# EAGLE board mubi-ESP32-36 (EAGLE 7.2.0)
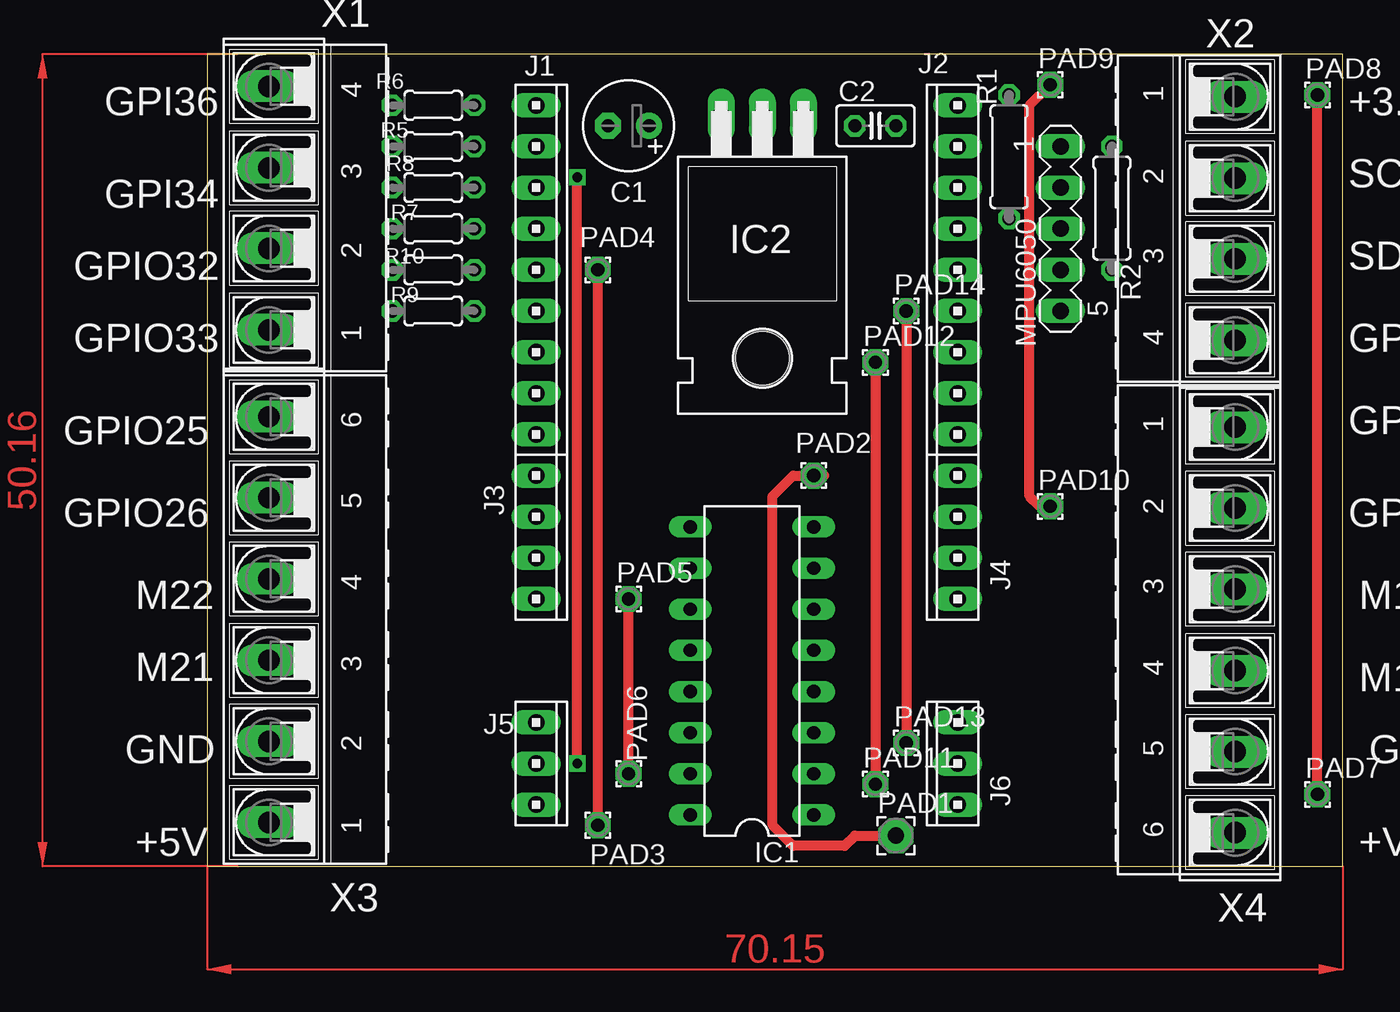
[diagram p0: board, top side]
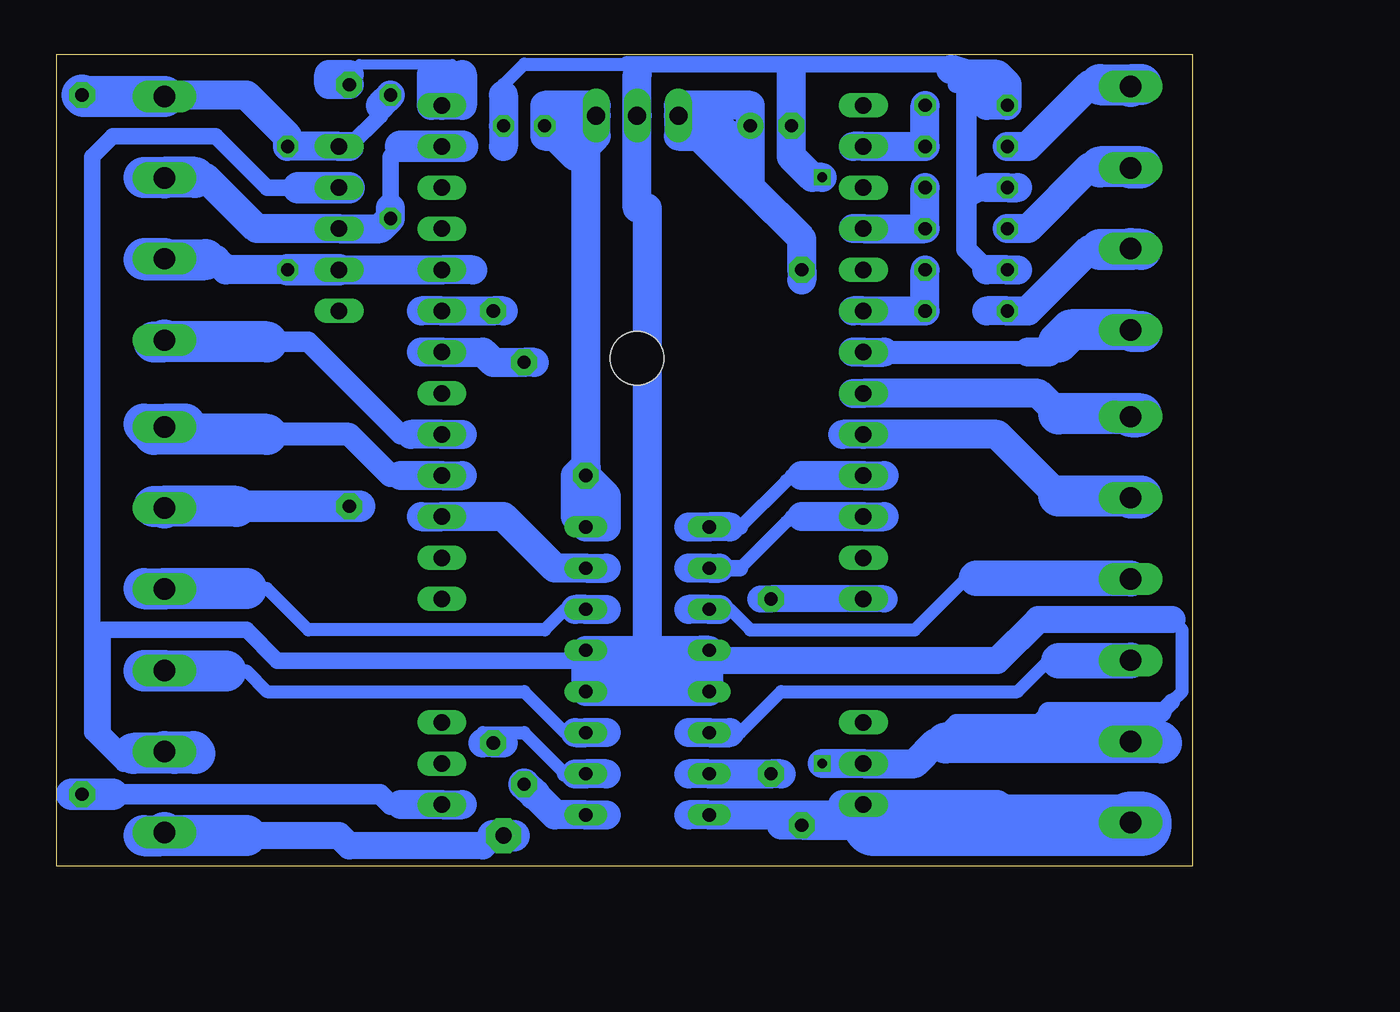
[diagram p1: board, bottom side, seen from below]

Size 70.15 x 50.16 mm. Coordinates in mm from the lower left corner, seen from the top.
Outline: 0,0 70.15,0 70.15,50.16 0,50.16 0,0
Copper layers (1*16): Top 0.035mm / dielectric 1.5mm / Bottom 0.035mm
Design rules "default": minimum track width 10mil, minimum drill 24mil, track to track 8mil, track to pad 8mil, pad to pad 8mil, via to via 8mil, smd to smd 8mil, copper to edge 40mil, drill to drill 8mil, minimum pad ring 10mil, minimum via ring 8mil, stop-mask expansion 4mil, vias tented up to drill 0mil, thermal gap 10mil

## Footprints (pad centres in the part's own frame; a part is rotated, then mirrored left to right if it is on the bottom)
E2,5-6 = drill 0.813 pad 1.6: + -1.27,0 | drill 0.813 pad 1.6 octagon: - 1.27,0
C025-025X050 = drill 0.813 octagon: 1 -1.27,0; 2 1.27,0
DIL16 = drill 0.813 long: 1 -8.89,-3.81; 2 -6.35,-3.81; 3 -3.81,-3.81; 4 -1.27,-3.81; 5 1.27,-3.81; 6 3.81,-3.81; 7 6.35,-3.81; 8 8.89,-3.81; 9 8.89,3.81; 10 6.35,3.81; 11 3.81,3.81; 12 1.27,3.81; 13 -1.27,3.81; 14 -3.81,3.81; 15 -6.35,3.81; 16 -8.89,3.81
TO220H = drill 1.118 long: 1 -2.54,-10.16; 2 0,-10.16; 3 2.54,-10.16 | hole 3.302: 0,4.826
10X09MTA = drill 1.016 long: 1 10.16,0; 2 7.62,0; 3 5.08,0; 4 2.54,0; 5 0,0; 6 -2.54,0; 7 -5.08,0; 8 -7.62,0; 9 -10.16,0
10X04MTA = drill 1.016 long: 1 3.81,0; 2 1.27,0; 3 -1.27,0; 4 -3.81,0
10X03MTA = drill 1.016 long: 1 2.54,0; 2 0,0; 3 -2.54,0
MA05-1 = drill 1.016 long: 1 -5.08,0; 2 -2.54,0; 3 0,0; 4 2.54,0; 5 5.08,0
2,15/1,0 = drill 1.016 pad 2.159 octagon: 1 0,0
1,6/0,8 = drill 0.813 pad 1.6 octagon: 1 0,0
0207/7 = drill 0.813 octagon: 1 -3.81,0; 2 3.81,0
0204/5 = drill 0.813 octagon: 1 -2.54,0; 2 2.54,0
AK500/4-H = drill 1.321 long: 1 -7.518,0; 2 -2.489,0; 3 2.489,0; 4 7.518,0
AK500/6-H = drill 1.321 long: 1 -12.522,0; 2 -7.518,0; 3 -2.515,0; 4 2.515,0; 5 7.518,0; 6 12.522,0

## Placement (x,y rotation side)
C1  [E2,5-6]  26.04,45.72 180 top
C2  [C025-025X050]  41.27,45.72 0 top
IC1  L293D  [DIL16]  33.66,12.07 90 top
IC2  7805T  [TO220H]  34.29,36.2 180 top
J1  [10X09MTA]  20.32,36.83 270 top
J2  [10X09MTA]  46.36,36.83 90 top
J3  [10X04MTA]  20.32,20.32 270 top
J4  [10X04MTA]  46.36,20.32 90 top
J5  [10X03MTA]  20.32,6.35 270 top
J6  [10X03MTA]  46.36,6.35 90 top
MPU6050  [MA05-1]  52.7,39.37 270 top
PAD1  WIREPAD2,15/1,0  [2,15/1,0]  42.55,1.91 0 top
PAD2  WIREPAD1,6/0,8  [1,6/0,8]  37.47,24.13 0 top
PAD3  WIREPAD1,6/0,8  [1,6/0,8]  24.13,2.54 0 top
PAD4  WIREPAD1,6/0,8  [1,6/0,8]  24.13,36.83 0 top
PAD5  WIREPAD1,6/0,8  [1,6/0,8]  26.04,16.51 0 top
PAD6  WIREPAD1,6/0,8  [1,6/0,8]  26.04,5.71 0 top
PAD7  WIREPAD1,6/0,8  [1,6/0,8]  68.58,4.44 0 top
PAD8  WIREPAD1,6/0,8  [1,6/0,8]  68.58,47.62 0 top
PAD9  WIREPAD1,6/0,8  [1,6/0,8]  52.07,48.26 0 top
PAD10  WIREPAD1,6/0,8  [1,6/0,8]  52.07,22.23 0 top
PAD11  WIREPAD1,6/0,8  [1,6/0,8]  41.27,5.08 0 top
PAD12  WIREPAD1,6/0,8  [1,6/0,8]  41.27,31.12 0 top
PAD13  WIREPAD1,6/0,8  [1,6/0,8]  43.18,7.62 0 top
PAD14  WIREPAD1,6/0,8  [1,6/0,8]  43.18,34.29 0 top
R1  4K7  [0207/7]  49.53,43.81 90 top
R2  4K7  [0207/7]  55.88,40.64 90 top
R5  5K6  [0204/5]  13.97,44.45 0 top
R6  10K  [0204/5]  13.97,46.99 180 top
R7  5K6  [0204/5]  13.97,39.37 0 top
R8  10K  [0204/5]  13.97,41.91 180 top
R9  5K6  [0204/5]  13.97,34.29 0 top
R10  10K  [0204/5]  13.97,36.83 180 top
X1  [AK500/4-H]  3.81,40.64 90 top
X2  [AK500/4-H]  63.5,40.01 270 top
X3  [AK500/6-H]  3.81,15.24 90 top
X4  [AK500/6-H]  63.5,14.61 270 top

## Library data of the parts
C1 R5-R10 = resistor
C2 R1 R2 = rcl
IC1 = st-microelectronics; MPN: L293D; OC_FARNELL: 9589619; OC_NEWARK: 56P8249
IC2 = linear
J1-J6 = con-amp
MPU6050 = con-lstb; OC_FARNELL: unknown; OC_NEWARK: unknown
PAD1-PAD14 = wirepad
X1 X2 = con-ptr500; OC_FARNELL: unknown; OC_NEWARK: unknown
X3 X4 = con-ptr500

## Nets
+3.3V: J6.3 MPU6050.1 PAD7.1 PAD8.1 R1.2 R2.2 X2.1
+5V: C1.+ IC1.16 IC2.3 J5.1 PAD3.1 PAD4.1 X3.1
+VBAT: C2.1 IC1.8 IC2.1 PAD1.1 PAD2.1 X4.6
CM11: IC1.2 J2.6 PAD13.1 PAD14.1
CM12: IC1.7 J4.2
CM21: IC1.15 J3.1 PAD5.1 PAD6.1
CM22: IC1.10 J3.3
ENAM1: IC1.1 J2.7 PAD11.1 PAD12.1
ENAM2: IC1.9 J3.4
GND: C1.- C2.2 IC1.4 IC1.5 IC1.12 IC1.13 IC2.2 J5.2 MPU6050.2 R6.2 R8.2 R10.2 X3.2 X4.5
GPI34: J1.6 R7.2 R8.1
GPI36: J1.8 R5.2 R6.1
GPIO16/RX2: J4.1 X4.1
GPIO17/TX2: J2.9 X2.4
GPIO23: J2.1 PAD9.1 PAD10.1 X4.2
GPIO25: J1.2 X3.6
GPIO26: J1.1 X3.5
GPIO32: J1.4 R9.2 R10.1
GPIO33: J1.3 X1.1
M11: IC1.3 X4.4
M12: IC1.6 X4.3
M21: IC1.14 X3.3
M22: IC1.11 X3.4
N$3: R5.1 X1.4
N$5: R7.1 X1.3
N$8: R9.1 X1.2
SCL: J2.2 MPU6050.3 R1.1 X2.2
SDA: J2.5 MPU6050.4 R2.1 X2.3

## Tracks (layer width: path | path; a pad name or v marks a point on that pad's centre or on a via)
+3.3V
  Top 0.61: PAD7.1 PAD8.1
  Bottom 1.016: 50.16,46.99 50.16,46.36 52.07,44.45
  Bottom 1.27: 48.9,3.81 49.53,3.81 50.16,4.44 66.67,4.44
  Bottom 1.778: 64.77,47.52 64.67,47.62 58.42,47.62 55.88,45.09 R2.2 MPU6050.1 52.07,44.45 | 45.09,3.81 J6.3 48.9,3.81 | R1.2 50.16,46.99
  Bottom 1.93: 66.67,4.44 PAD7.1 69.21,4.44
  Bottom 2.54: X2.1 64.77,47.52 68.48,47.52 PAD8.1
+5V
  Top 0.61: PAD4.1 PAD3.1
  Bottom 1.778: J5.1 21.59,3.81 | J5.1 12.07,3.81 10.8,3.17 20.96,3.17 | 24.13,36.2 PAD4.1 24.13,38.73 27.3,41.91 | IC2.3 31.75,46.99 27.3,46.99 C1.+ 27.3,41.91 | IC2.3 31.75,45.09 30.48,45.09 27.3,41.91 | IC2.3 29.84,46.36 27.94,44.45 | 31.12,3.17 IC1.16 20.96,3.17 | 25.4,2.54 PAD3.1 20.32,2.54 J5.1 | 19.69,2.54 20.96,2.54 20.96,3.17
  Bottom 3.81: X3.1 3.17,2.72 3.17,2.54 19.69,2.54
+VBAT  (via drill 0.6)  (1 unrouted)
  Top 0.61: 38.1,24.13 PAD2.1 36.2,24.13 34.93,22.86 34.93,2.54 36.2,1.27 39.37,1.27 40.01,1.91 41.91,1.91
  Bottom 0.813: 37.47,45.72 IC2.1
  Bottom 1.676: 43.18,1.91 43.81,1.27 52.07,1.27 52.7,1.91 58.42,1.91
  Bottom 1.778: IC1.8 PAD2.1 | 37.47,24.77 37.47,44.45 36.83,45.09 IC2.1 | IC2.1 36.83,46.99 40.01,46.99 C2.1 | C2.1 40.01,45.09 39.37,45.09 38.1,43.81 38.1,46.36 | 38.1,46.36 39.37,46.36 C2.1 | IC2.1 38.1,46.36 | IC1.8 36.2,20.96 36.2,22.86 PAD2.1 | IC1.8 38.1,21.59 38.1,24.13 37.47,24.77 | 37.47,24.77 PAD2.1
  Bottom 1.93: 41.91,1.91 PAD1.1 43.18,1.91
  Bottom 2.54: 58.42,1.91 63.68,1.91 | 64.77,1.91 63.68,1.91 | 63.68,1.91 X4.6
  other vias: 37.47,24.13
CM11
  Top 0.61: PAD14.1 PAD13.1
  Bottom 0.813: PAD13.1 43.81,8.25 41.27,8.25 38.73,5.71
  Bottom 1.016: 38.73,5.71 38.1,5.71
  Bottom 1.778: 47.62,34.29 J2.6 PAD14.1 42.55,34.29 | 43.81,7.62 PAD13.1 42.55,7.62 | 38.1,5.71 IC1.2 36.2,5.71
CM12
  Bottom 1.778: 36.2,18.41 IC1.7 39.37,18.41 42.55,21.59 J4.2 47.62,21.59
CM21
  Top 0.61: PAD6.1 PAD5.1
  Bottom 1.422: J3.1 19.05,16.51
  Bottom 1.676: 19.05,16.51 PAD5.1 26.67,16.51
  Bottom 1.778: 31.12,5.71 IC1.15 PAD6.1 25.4,5.71
CM22
  Bottom 0.813: 27.94,18.41 25.08,21.27 24.77,21.59 24.13,21.59
  Bottom 1.016: 29.21,18.41 27.94,18.41
  Bottom 1.778: 31.12,18.41 IC1.10 29.21,18.41 | 19.05,21.59 J3.3 24.13,21.59
ENAM1
  Top 0.61: PAD12.1 PAD11.1
  Bottom 1.778: 36.2,3.17 IC1.1 39.37,3.17 40.64,4.44 | 47.62,31.75 J2.7 43.81,31.75 43.18,31.12 PAD12.1 40.64,31.12
  Bottom 1.93: 40.64,4.44 PAD11.1
ENAM2
  Bottom 0.813: 27.94,20.96 25.08,23.81 24.77,24.13 24.13,24.13
  Bottom 1.016: 27.94,20.96 28.57,20.96
  Bottom 1.778: 28.57,20.96 IC1.9 31.12,20.96 | 19.05,24.13 J3.4 24.13,24.13
GND  (via drill 0.6)
  Top 0.61: v22.86,6.35 v22.86,42.55
  Bottom 0.813: C1.- 24.77,48.9 25.4,49.53 33.66,49.53 34.29,48.9 34.93,49.53 41.27,49.53 42.55,48.26 C2.2 | 1.27,10.16 0.63,10.8 0.63,14.61 1.27,15.24
  Bottom 1.016: 65.4,6.99 66.04,6.99 67.31,8.25 67.31,14.61 58.42,14.61 56.52,12.7 37.47,12.7 | 55.24,41.91 57.15,41.91 60.33,45.09 66.67,45.09 67.94,43.81 67.94,8.25 66.04,6.35 63.5,6.35 62.87,6.99 | 14.92,49.21 15.24,49.53 34.93,49.53 | 14.61,48.26 13.97,48.9 13.97,48.26 | 15.88,7.62 14.61,8.89 9.52,8.89 | 9.52,8.89 8.89,9.53 | 1.91,9.53 1.27,10.16 | 15.24,7.62 10.8,7.62 9.52,8.89
  Bottom 1.27: 13.97,48.9 13.97,41.27 | 13.97,41.27 13.97,38.1 12.7,36.83 | 12.7,41.91 13.97,41.27 | 8.89,9.53 1.91,9.53
  Bottom 1.676: 1.27,15.24 9.52,15.24 12.07,12.7 30.48,12.7
  Bottom 1.778: IC1.12 IC1.13 IC1.4 | IC1.5 37.47,12.7 IC1.4 | 34.29,48.9 IC2.2 34.29,40.64 33.66,40.64 33.66,12.07 | v22.86,6.35 J5.2 17.14,6.35 15.88,7.62 | v22.86,42.55 23.5,42.55 24.77,43.81 24.77,48.9 | 42.55,44.45 C2.2 42.55,47.62 | 13.97,48.9 12.7,46.99 R6.2 11.43,48.26 12.07,48.9 13.97,48.9 | 13.97,48.9 14.92,49.21 | 10.8,36.83 R10.2 12.7,36.83 | 10.8,41.91 R8.2 12.7,41.91 | IC1.4 IC1.5 | IC1.5 IC1.12 | IC1.12 30.48,13.34 30.48,12.7 30.48,12.07 33.66,12.07 | 36.83,12.07 33.66,12.07
  Bottom 1.93: 52.07,41.91 MPU6050.2 55.24,41.91
  Bottom 2.54: X4.5 61.7,7.09 61.6,6.99 62.87,6.99 65.4,6.99 | X3.2 2.01,7.72 1.91,7.62 15.24,7.62
GPI34
  Bottom 1.778: 20.96,39.37 J1.6 R7.2 R8.1
GPI36
  Bottom 1.778: 20.96,44.45 J1.8 R5.2 R6.1
GPIO16/RX2
  Bottom 1.422: 48.9,24.13 49.53,24.13 52.07,26.67 57.15,26.67
  Bottom 1.778: 45.09,24.13 J4.1 48.9,24.13
  Bottom 2.54: 57.15,26.67 64.13,26.67 64.77,27.3 63.32,27.3 | 62.23,27.3 63.32,27.3 | 63.32,27.3 X4.1
GPIO17/TX2
  Bottom 1.27: 48.26,26.67 48.9,26.67 54.61,32.38 57.15,32.38
  Bottom 1.778: 45.09,26.67 J2.9 48.26,26.67
  Bottom 2.54: 57.15,32.38 63.6,32.38 | 64.13,32.38 63.6,32.38 | 63.6,32.38 X2.4
GPIO23
  Top 0.61: PAD10.1 51.44,22.23 50.8,22.86 50.8,46.99 PAD9.1
  Bottom 0.61: 52.07,48.9 51.44,49.53 45.72,49.53 45.09,48.9
  Bottom 1.778: PAD9.1 53.34,48.26 53.34,48.9 52.07,48.9 | 45.09,48.9 45.09,46.99 J2.1 | J2.1 46.99,46.99 46.99,48.9 46.36,48.9 J2.1
  Bottom 1.93: 51.44,22.23 PAD10.1 59.05,22.23
  Bottom 2.54: 59.05,22.23 63.6,22.23 | 64.13,22.23 63.6,22.23 | 63.6,22.23 X4.2
GPIO25
  Bottom 1.778: 20.96,29.21 J1.2 9.52,29.21 8.25,27.94
  Bottom 2.54: X3.6 3.35,27.76 3.17,27.94 8.25,27.94
GPIO26
  Bottom 1.778: 21.59,26.67 J1.1 12.07,26.67 8.25,22.86
  Bottom 2.54: X3.5 3.28,22.76 3.17,22.86 8.25,22.86
GPIO32
  Bottom 1.778: 20.96,34.29 J1.4 R9.2 R10.1
GPIO33
  Bottom 1.422: 19.05,31.75 10.16,31.75
  Bottom 1.778: 20.96,31.75 J1.3 19.05,31.75 | 8.25,32.38 8.89,31.75 10.16,31.75
  Bottom 2.54: 3.17,33.02 3.71,33.02 X1.1 7.52,33.12 8.25,32.38
M11
  Bottom 0.813: 59.69,12.07 58.42,12.07 57.15,10.8 41.27,10.8 38.73,8.25 38.1,8.25
  Bottom 1.778: 38.1,8.25 IC1.3 36.2,8.25
  Bottom 2.54: X4.4 64.74,12.09 64.77,12.07 59.69,12.07
M12
  Bottom 0.813: 38.1,15.88 38.73,15.88 40.01,14.61 54.61,14.61 57.15,17.14 58.42,17.14
  Bottom 1.778: 36.2,15.88 IC1.6 38.1,15.88
  Bottom 2.54: 58.42,17.14 63.52,17.14 | 64.77,17.14 63.52,17.14 | 63.52,17.14 X4.3
M21
  Bottom 0.813: 28.57,8.25 27.94,8.25 25.4,10.8 10.8,10.8 8.89,12.7 8.25,12.7
  Bottom 1.778: 31.12,8.25 IC1.14 28.57,8.25
  Bottom 2.184: 8.25,12.7 3.83,12.7 X3.3
M22
  Bottom 0.813: 29.21,15.88 28.57,15.88 27.3,14.61 17.14,14.61 13.97,17.78 13.34,17.78
  Bottom 1.778: 31.12,15.88 IC1.11 29.21,15.88
  Bottom 2.184: 13.34,17.78 3.83,17.78 X3.4
N$3
  Bottom 1.778: R5.1 10.16,44.45 6.35,48.26 5.72,48.26
  Bottom 2.54: 5.72,48.26 3.71,48.26 | 3.17,48.26 3.71,48.26 | 3.71,48.26 X1.4
N$5
  Bottom 1.778: 5.72,43.18 6.35,43.18 10.16,39.37 R7.1
  Bottom 2.54: X1.3 3.23,43.13 3.17,43.18 5.72,43.18
N$8
  Bottom 1.778: 12.7,34.29 R9.1 10.16,34.29 6.35,38.1 5.72,38.1
  Bottom 2.54: 5.72,38.1 3.76,38.1 | 3.17,38.1 3.76,38.1 | 3.76,38.1 X1.2
SCL
  Bottom 1.016: 49.53,40.64 49.53,43.81 48.9,44.45
  Bottom 1.778: 49.53,40.64 R1.1 50.16,39.37 MPU6050.3 57.79,39.37 60.96,42.55 61.6,42.55
  Bottom 1.93: 48.9,44.45 J2.2 45.09,44.45
  Bottom 2.54: 61.6,42.55 63.55,42.55 | 64.77,42.55 63.55,42.55 | 63.55,42.55 X2.2
SDA
  Bottom 1.778: R2.1 59.69,36.83 60.33,37.47 60.96,37.47 | MPU6050.4 J2.5 44.45,36.83
  Bottom 1.93: MPU6050.4 R2.1
  Bottom 2.54: X2.3 64.72,37.52 64.77,37.47 60.96,37.47
(copper drawn outside any net)
  shapes: Top area x2

## Text on the board
tNames: GPI36 | +3.3V | SCL | GPI34 | SDA | GPIO32 | GPIO33 | GPIO17 | GPIO16 | GPIO25 | GPIO26 | GPIO23 | M22 | M12 | M21 | M11 | GND | GND | +5V | +VBAT